# EAGLE board HV-DST (EAGLE 7.5.0)
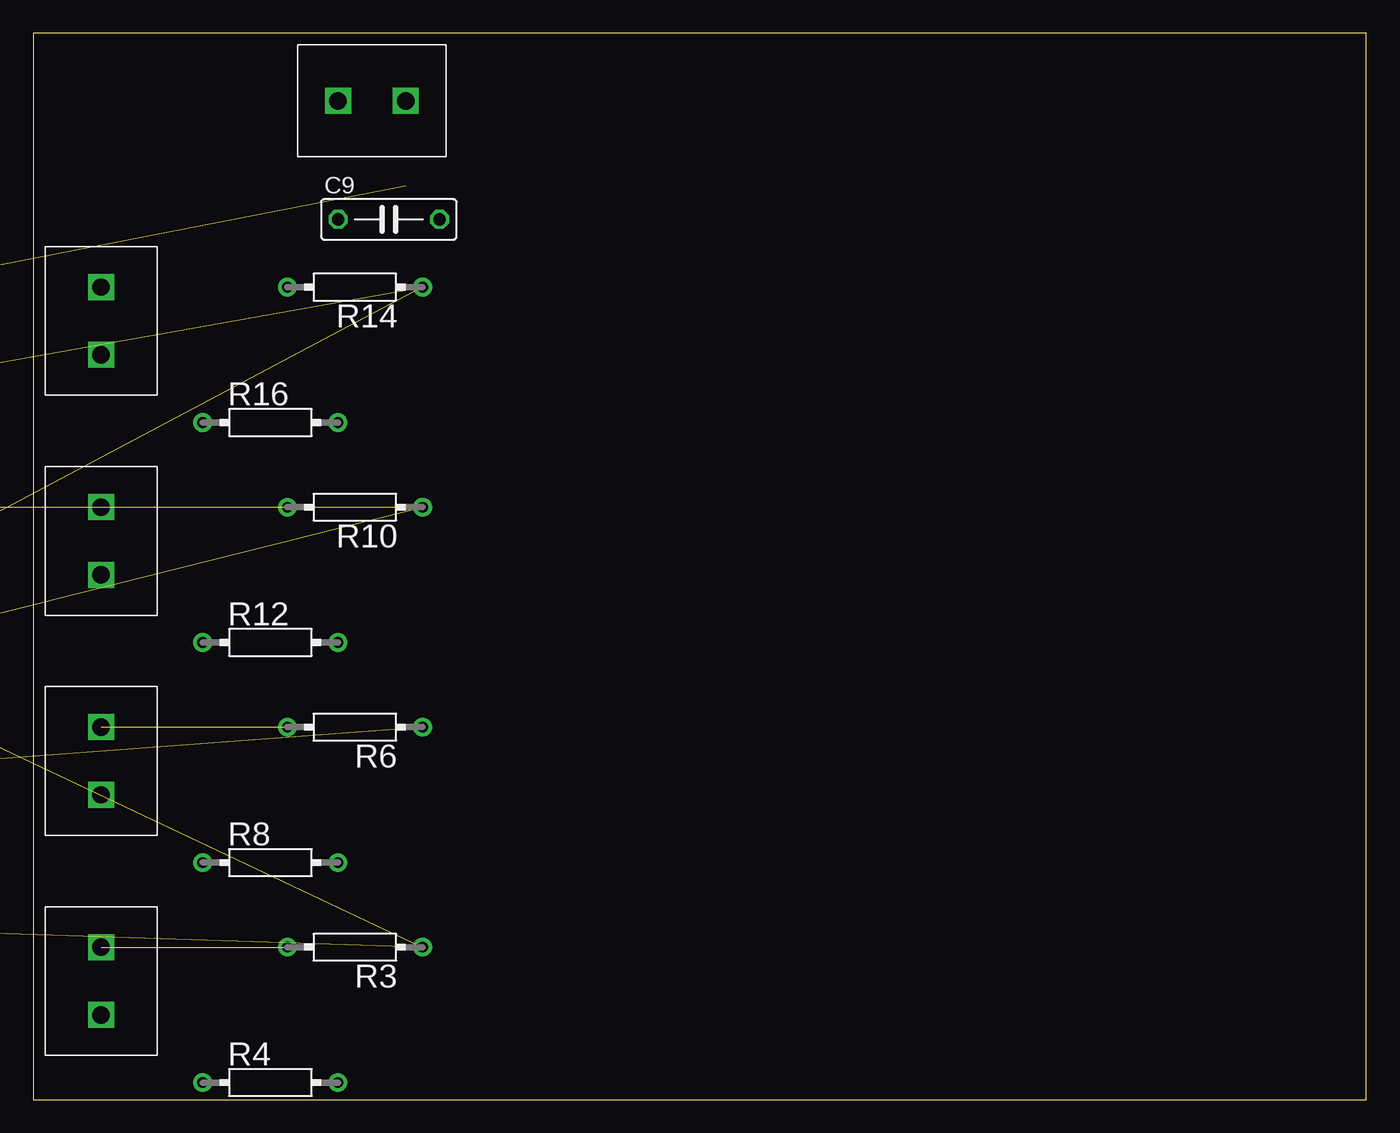
[diagram p0: board, top side]
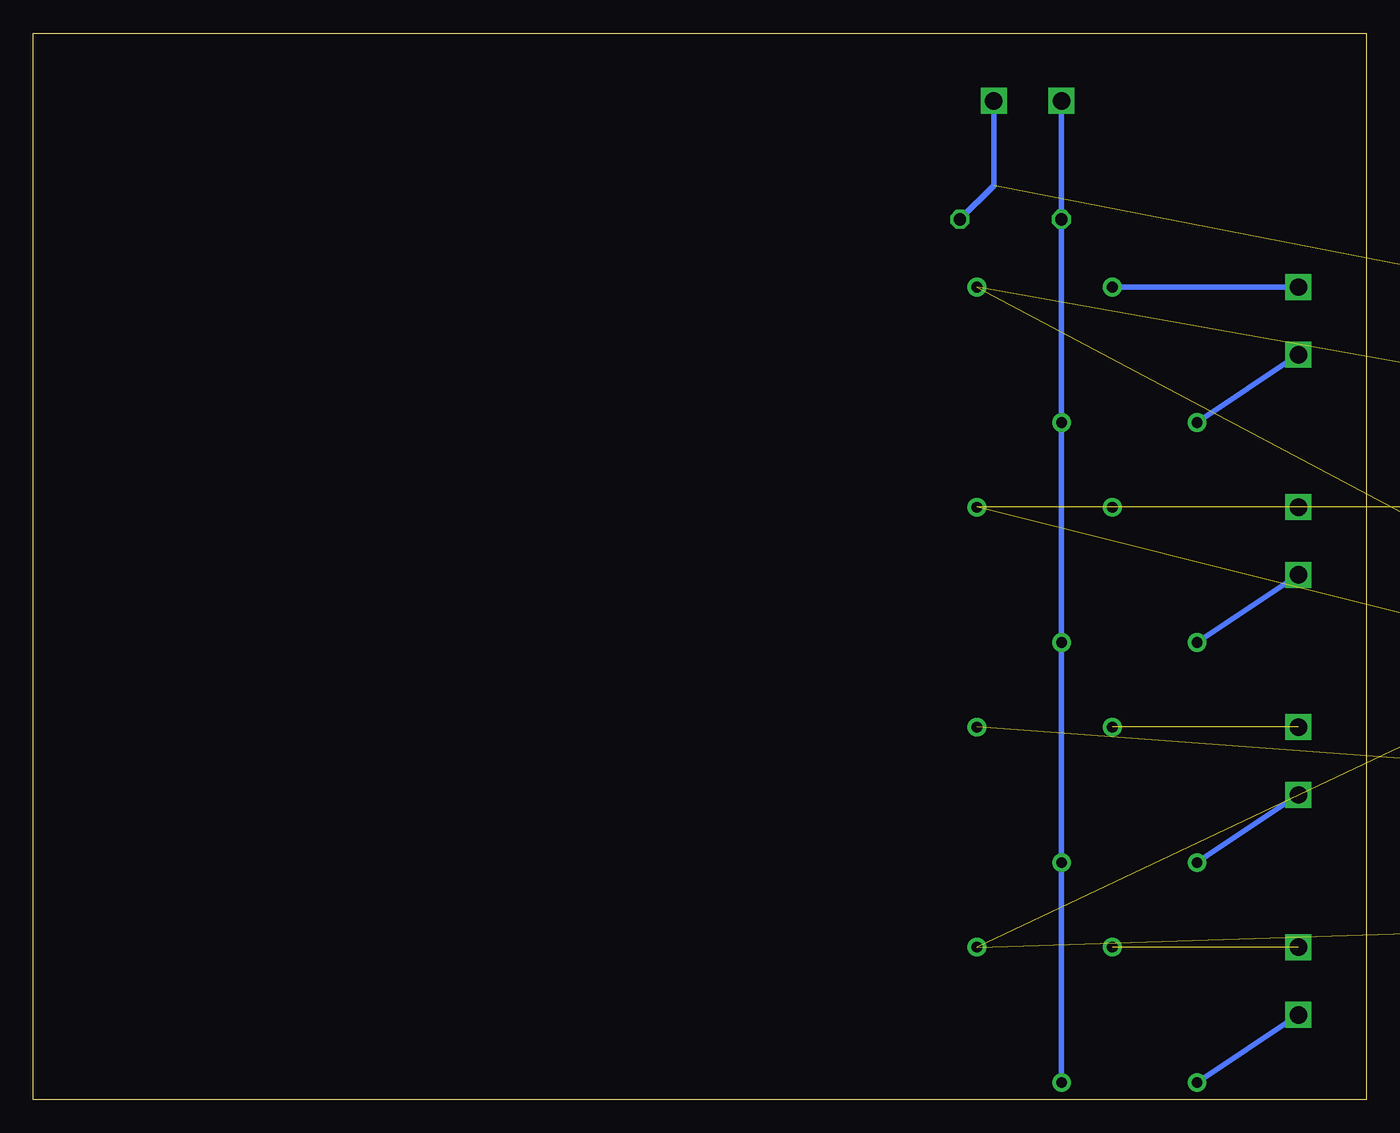
[diagram p1: board, bottom side, seen from below]

Size 100 x 80 mm. Coordinates in mm from the lower left corner, seen from the top.
Outline: 0,0 100,0 100,80 0,80 0,0
Copper layers (1*16): Top 0.035mm / dielectric 1.5mm / Bottom 0.035mm
Design rules "default": minimum track width 10mil, minimum drill 24mil, track to track 8mil, track to pad 8mil, pad to pad 8mil, via to via 8mil, smd to smd 8mil, copper to edge 40mil, drill to drill 8mil, minimum pad ring 10mil, minimum via ring 8mil, stop-mask expansion 4mil, vias tented up to drill 0mil, thermal gap 10mil

## Footprints (pad centres in the part's own frame; a part is rotated, then mirrored left to right if it is on the bottom)
C2.5-2 = drill 0.813 pad 1.6 octagon: 1 -1.27,0; 2 1.27,0
C075-032X103 = drill 0.914 octagon: 1 -3.81,0; 2 3.81,0
E2,5-5 = drill 0.813 pad 1.6: + -1.27,0 | drill 0.813 pad 1.6 octagon: - 1.27,0
317TS = drill 1.016 long: 1 -2.54,-2.54; 2 0,-2.54; 3 2.54,-2.54
RS1/4 = drill 0.8 pad 1.4: 1 -5.08,0; 2 5.08,0
FE05-1 = drill 0.813 long: 1 -5.08,0; 2 -2.54,0; 3 0,0; 4 2.54,0; 5 5.08,0
TO92-CBE = drill 0.813 long: B 0,0; C -2.54,0; E 2.54,0
ED2609 = drill 1.3 square: 1 0,0; 2 5.08,0

## Placement (x,y rotation side)
C2  330pF  [C2.5-2]  -22.86,53.34 0 top  (outside the outline)
C4  330pF  [C2.5-2]  -35.56,53.34 0 top  (outside the outline)
C6  330pF  [C2.5-2]  -48.26,53.34 0 top  (outside the outline)
C8  330pF  [C2.5-2]  -60.96,53.34 0 top  (outside the outline)
C9  0.01uF  [C075-032X103]  26.67,66.04 0 top
C10  [E2,5-5]  -19.05,59.69 0 top  (outside the outline)
C11  [E2,5-5]  -27.94,59.69 0 top  (outside the outline)
IC1  [317TS]  -41.91,16.51 0 top  (outside the outline)
R1  [RS1/4]  -36.83,58.42 0 top  (outside the outline)
R2  100k  [RS1/4]  -54.61,13.97 0 top  (outside the outline)
R3  2.2k  [RS1/4]  24.13,11.43 180 top
R4  10M  [RS1/4]  17.78,1.27 0 top
R5  100k  [RS1/4]  -44.45,22.86 0 top  (outside the outline)
R6  2.2k  [RS1/4]  24.13,27.94 180 top
R7  [RS1/4]  -49.53,58.42 0 top  (outside the outline)
R8  10M  [RS1/4]  17.78,17.78 0 top
R9  100k  [RS1/4]  -31.75,30.48 0 top  (outside the outline)
R10  2.2k  [RS1/4]  24.13,44.45 180 top
R11  [RS1/4]  -62.23,58.42 0 top  (outside the outline)
R12  10M  [RS1/4]  17.78,34.29 0 top
R13  100k  [RS1/4]  -19.05,38.1 0 top  (outside the outline)
R14  2.2k  [RS1/4]  24.13,60.96 180 top
R15  [RS1/4]  -19.05,64.77 0 top  (outside the outline)
R16  10M  [RS1/4]  17.78,50.8 0 top
R17  100k  [RS1/4]  -57.15,38.1 0 top  (outside the outline)
R18  100k  [RS1/4]  -19.05,45.72 0 top  (outside the outline)
SV1  [FE05-1]  -59.69,-3.81 0 top  (outside the outline)
T1  [TO92-CBE]  -40.64,44.45 0 top  (outside the outline)
T2  [TO92-CBE]  -48.26,44.45 0 top  (outside the outline)
T3  [TO92-CBE]  -55.88,44.45 0 top  (outside the outline)
T4  [TO92-CBE]  -63.5,44.45 0 top  (outside the outline)
U$1  ED2609  [ED2609]  5.08,11.43 270 top
U$2  ED2609  [ED2609]  5.08,27.94 270 top
U$3  ED2609  [ED2609]  5.08,44.45 270 top
U$4  ED2609  [ED2609]  5.08,60.96 270 top
U$5  ED2609  [ED2609]  27.94,74.93 180 top
U$6  ED2609  [ED2609]  -33.02,13.97 0 top  (outside the outline)

## Library data of the parts
C2 C4 C6 C8 = capacitor-wima
C9-C11 = rcl
IC1 = v-reg
R1-R18 = resistor-power; MF: OHMITE; MPN: RRS1K0; OC_FARNELL: unknown; OC_NEWARK: 01F7661
SV1 = con-lsta; OC_FARNELL: unknown; OC_NEWARK: unknown
T1-T4 = transistor
U$1-U$6 = muon-tube

## Nets
+3V3: C11.+ IC1.2 R1.2 R7.2 R11.2 R15.2 R17.2
G1: C2.1 R1.1 SV1.1 T1.C
G2: C4.1 R7.1 SV1.2 T2.C
G3: C6.1 R11.1 SV1.3 T3.C
G4: C8.1 R15.1 SV1.4 T4.C
GND: C2.2 C4.2 C6.2 C8.2 C9.2 C10.- C11.- R2.1 R5.1 R9.1 R13.1 R18.1 SV1.5 T1.E T2.E T3.E T4.E U$5.1 U$6.1
N$1: R2.2 R3.1 T1.B
N$2: R3.2 U$1.1
N$3: C10.+ IC1.3 U$6.2
N$4: R4.1 U$1.2
N$5: R5.2 R6.1 T2.B
N$6: R6.2 U$2.1
N$8: R8.1 U$2.2
N$9: R9.2 R10.1 T3.B
N$10: R10.2 U$3.1
N$11: IC1.1 R17.1 R18.2
N$12: R12.1 U$3.2
N$13: R13.2 R14.1 T4.B
N$14: R14.2 U$4.1
N$16: R16.1 U$4.2
V+: C9.1 R4.2 R8.2 R12.2 R16.2 U$5.2

## Tracks (layer width: path | path; a pad name or v marks a point on that pad's centre or on a via)
+3V3  (6 unrouted)
G1  (3 unrouted)
G2  (3 unrouted)
G3  (3 unrouted)
G4  (3 unrouted)
GND  (17 unrouted)
  Bottom 0.406: U$5.1 27.94,68.58 C9.2
N$1  (2 unrouted)
N$2  (1 unrouted)
N$3  (2 unrouted)
N$4
  Bottom 0.406: R4.1 U$1.2
N$5  (2 unrouted)
N$6  (1 unrouted)
N$8
  Bottom 0.406: R8.1 U$2.2
N$9  (2 unrouted)
N$10  (1 unrouted)
N$11  (2 unrouted)
N$12
  Bottom 0.406: R12.1 U$3.2
N$13  (2 unrouted)
N$14
  Bottom 0.406: U$4.1 R14.2
N$16
  Bottom 0.406: R16.1 U$4.2
V+
  Bottom 0.406: R4.2 R8.2 R12.2 R16.2 C9.1 U$5.2